# Altium PCB PCB1BK.PcbDoc
Units mil, origin at the board's own origin, x right, y up, seen from the top; angles counter-clockwise.
Board outline 6000 x 4000 mil, 2 copper layers (Top Layer, Bottom Layer); 109 components, 83 nets, 461 pads, 63 vias.
Unrouted connection lines stored in the file: 226.
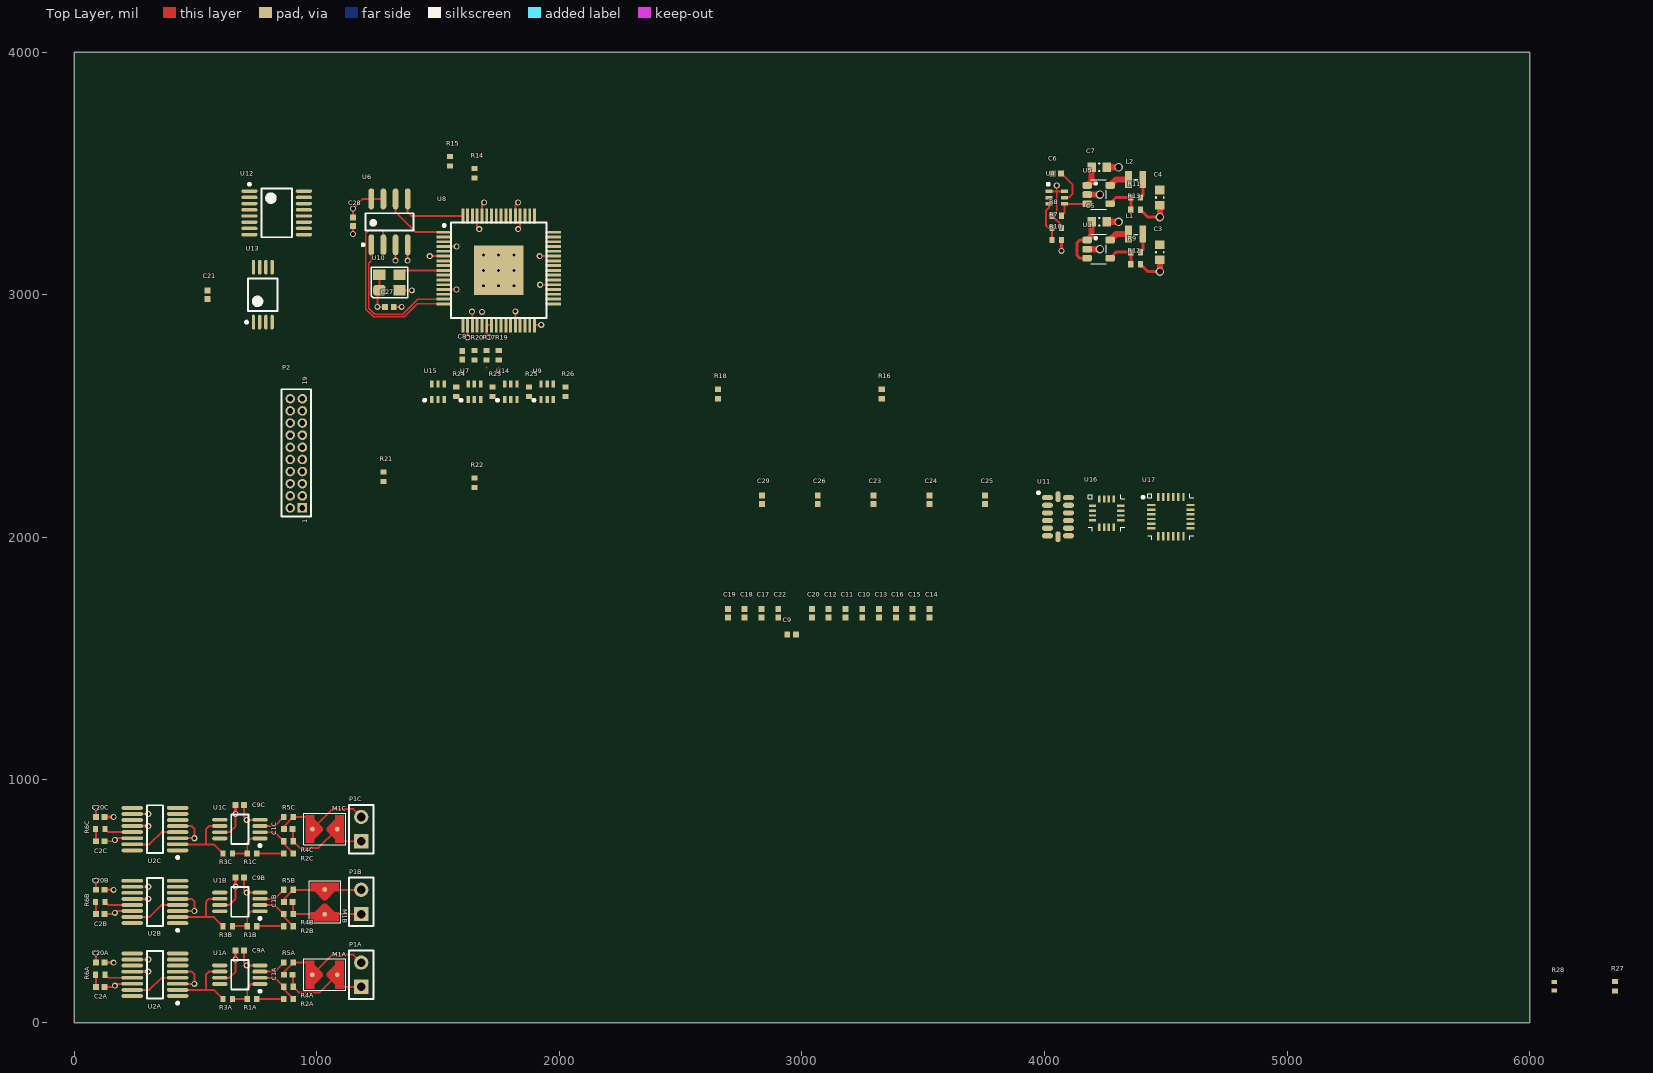
[diagram p0: Top Layer view]
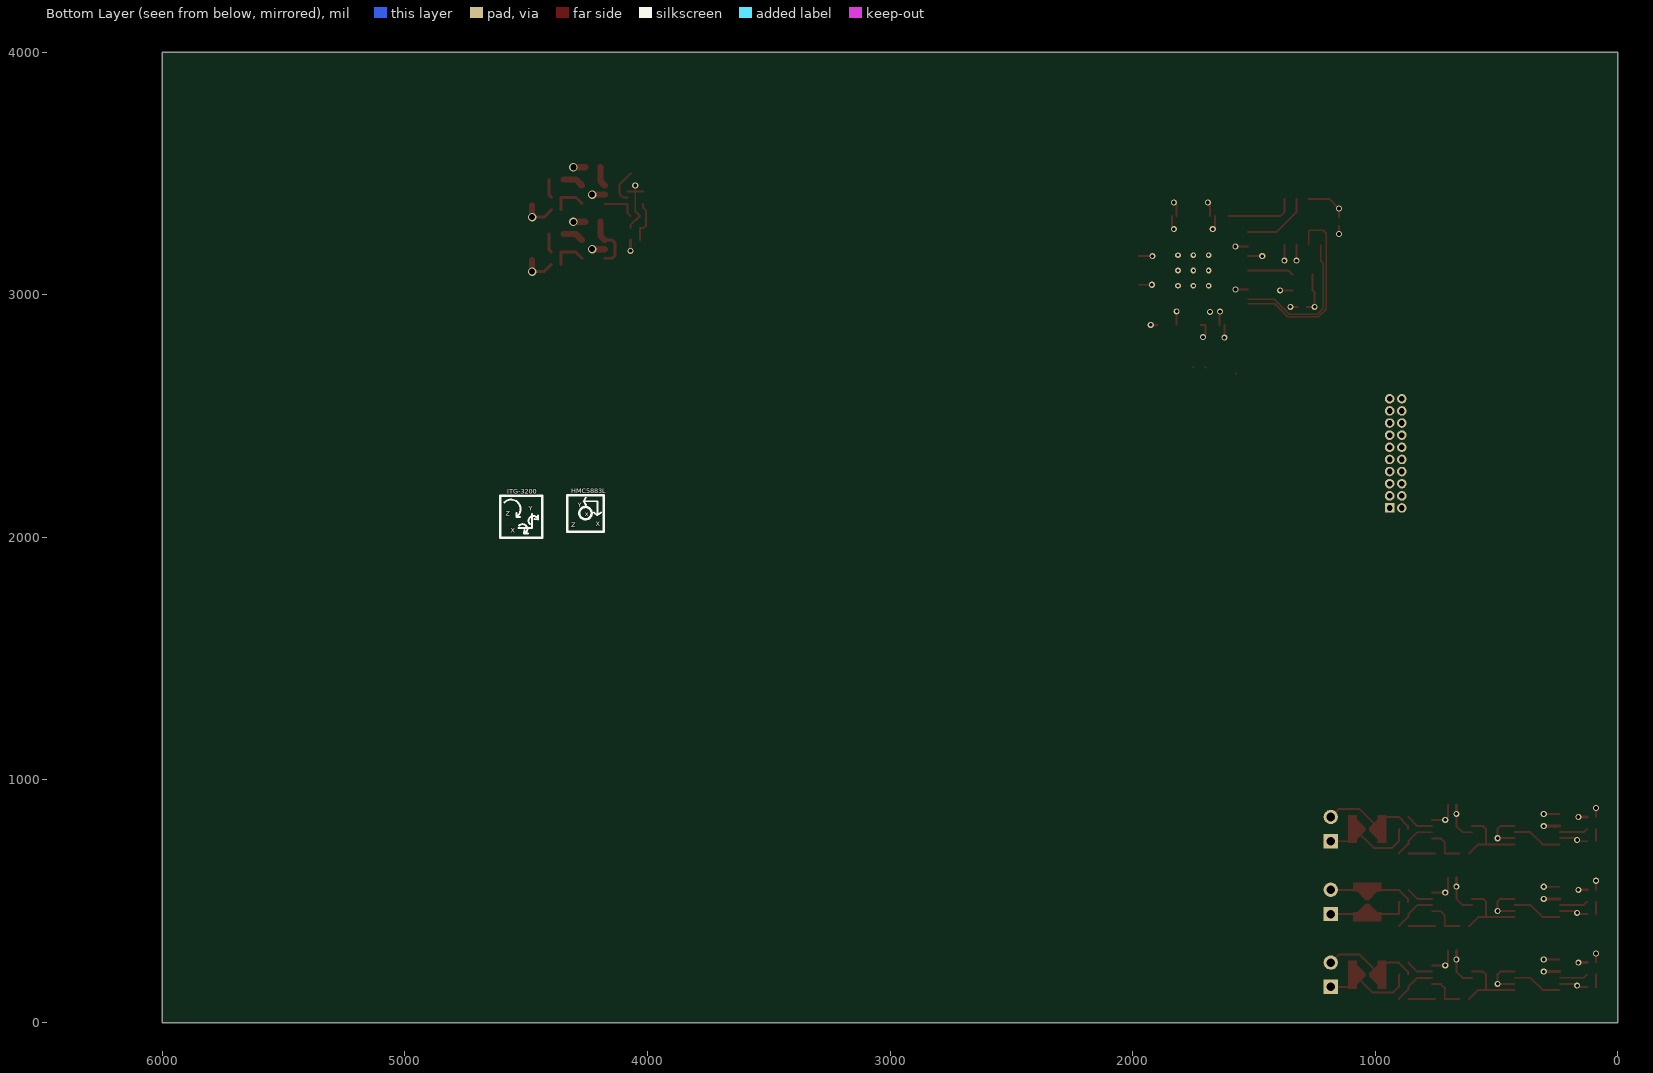
[diagram p1: Bottom Layer view, seen from below]

## Layer stack, top to bottom
Top Solder: solder mask 0.4, Solder Resist, Dk 3.5
Top Layer: signal copper 1.4
Dielectric 1: dielectric 12.6, FR-4, Dk 4.8
Bottom Layer: signal copper 1.4
Bottom Solder: solder mask 0.4, Solder Resist, Dk 3.5

## Board outline
0,0 6000,0 6000,4000 0,4000

## Design rules (kind name [scope] priority, off if disabled: settings)
Clearance [All] p1: gap=6
ComponentClearance [All] p1 off: gap=10 collisioncheckmode=3 verticalgap=10 showdistances=FALSE
HoleSize [All] p1: absolutevalues=TRUE maxlimit=100 minlimit=15 maxpercent=80.000 minpercent=20.000
HoleToHoleClearance [All] p1: gap=6 allowstackedmicrovias=TRUE
MinimumAnnularRing [All] p1: minimumring=5
PolygonConnect [All] p1: connectstyle=Relief reliefconductorwidth=10 reliefentries=4 polygonreliefangle="90 Angle" airgapwidth=10
RoomDefinition COIL2 [InComponentClass('COIL2')] p1: confinementstyle=ConfineIn formatcopy=TRUE lockcomponents=FALSE outline 33.5,647.5 1283.5,647.5 1283.5,947.5 33.5,947.5
RoomDefinition COIL1 [InComponentClass('COIL1')] p2: confinementstyle=ConfineIn formatcopy=TRUE lockcomponents=FALSE outline 33.5,347.5 1283.5,347.5 1283.5,647.5 33.5,647.5
RoomDefinition COIL0 [InComponentClass('COIL0')] p3: confinementstyle=ConfineIn formatcopy=TRUE lockcomponents=FALSE outline 33.5,47.5 1283.5,47.5 1283.5,347.5 33.5,347.5
RoutingVias [All] p1: holewidth=15 width=25 viastyle="Through Hole" minholewidth=15 minwidth=25 maxholewidth=40 maxwidth=50
SolderMaskExpansion [All] p1: expansion=4
UnpouredPolygon [All] p1: allowunpoured=FALSE
Width [All] p1: maxlimit=40 minlimit=6 preferedwidth=8
26 further rules are at their usual default settings.

## Classes and differential pairs
component class Top: R27 R28
component class COIL0: C1A C2A C9A C20A M1A P1A R1A R2A R3A R4A R5A R6A U1A U2A
component class COIL1: C1B C2B C9B C20B M1B P1B R1B R2B R3B R4B R5B R6B U1B U2B
component class COIL2: C1C C2C C9C C20C M1C P1C R1C R2C R3C R4C R5C R6C U1C U2C
component class CORE: C3 C4 C5 C6 C7 C8 C9 C10 C11 C12 C13 C14 C15 C16 C17 C18 C19 C20 C21 C22 L1 L2 P2 R7 R8 R9 R10 R11 R12 R13 R14 R15 R16 R17 R18 R19 R20 R21 R22 R23 R24 R25 R26 U3 U4 U5 U6 U7 U8 U9 U10 U12 U13 U14 U15
component class IMU: C23 C24 C25 C26 C27 C28 C29 U11 U16 U17
net class XLB: XLBR0 XLBR1 XLBT0 XLBT1
channel class Coils: COIL0 COIL1 COIL2

## Components (designator, comment, footprint, x,y, rotation, side; value= is the part's Value field where it differs from the comment)
C1A "CAP 25V 0402(1005)" CAPC0402(1005)60_N 883.5,197.5 r180 top (schematic designator C1)
C1B "CAP 25V 0402(1005)" CAPC0402(1005)60_N 883.5,497.5 r180 top (schematic designator C1)
C1C "CAP 25V 0402(1005)" CAPC0402(1005)60_N 883.5,797.5 r180 top (schematic designator C1)
C2A "CAP 100pF 25V 0402(1005)" CAPC0402(1005)60_N 108.5,147.5 r180 top (schematic designator C2)
C2B "CAP 100pF 25V 0402(1005)" CAPC0402(1005)60_N 108.5,447.5 r180 top (schematic designator C2)
C2C "CAP 100pF 25V 0402(1005)" CAPC0402(1005)60_N 108.5,747.5 r180 top (schematic designator C2)
C3 "CAP 10uF 6.3V 0603(1608)" CAPC0603(1608)100_N 4475,3175 r90 top
C4 "CAP 10uF 6.3V 0603(1608)" CAPC0603(1608)100_N 4475,3400 r90 top
C5 "CAP 10uF 6.3V 0603(1608)" CAPC0603(1608)100_N 4225,3300 r0 top
C6 "CAP 10nF 10V 0402(1005)" CAPC0402(1005)60_N 4050,3500 r0 top
C7 "CAP 10uF 6.3V 0603(1608)" CAPC0603(1608)100_N 4225,3525 r0 top
C8 "CAP 1uF 16V 0402(1005)" CAPC0402(1005)60_N 1600,2750 r270 top
C9 "CAP 100nF 25V 0402(1005)" CAPC0402(1005)60_N 2957.05,1600.1 r0 top
C9A "CAP 100nF 25V 0402(1005)" CAPC0402(1005)60_N 683.5,297.5 r180 top (schematic designator C9)
C9B "CAP 100nF 25V 0402(1005)" CAPC0402(1005)60_N 683.5,597.5 r180 top (schematic designator C9)
C9C "CAP 100nF 25V 0402(1005)" CAPC0402(1005)60_N 683.5,897.5 r180 top (schematic designator C9)
C10 "CAP 100nF 25V 0402(1005)" CAPC0402(1005)60_N 3248.31,1687.03 r90 top
C11 "CAP 100nF 25V 0402(1005)" CAPC0402(1005)60_N 3179.09,1687.03 r90 top
C12 "CAP 1uF 16V 0402(1005)" CAPC0402(1005)60_N 3109.88,1687.03 r90 top
C13 "CAP 1uF 16V 0402(1005)" CAPC0402(1005)60_N 3317.52,1687.03 r90 top
C14 "CAP 100nF 25V 0402(1005)" CAPC0402(1005)60_N 3525.16,1687.03 r90 top
C15 "CAP 100nF 25V 0402(1005)" CAPC0402(1005)60_N 3455.94,1687.03 r90 top
C16 "CAP 100nF 25V 0402(1005)" CAPC0402(1005)60_N 3386.73,1687.03 r90 top
C17 "CAP 100nF 25V 0402(1005)" CAPC0402(1005)60_N 2833.03,1687.03 r90 top
C18 "CAP 1uF 16V 0402(1005)" CAPC0402(1005)60_N 2763.82,1687.03 r90 top
C19 "CAP 1uF 16V 0402(1005)" CAPC0402(1005)60_N 2694.61,1687.03 r90 top
C20 "CAP 100nF 25V 0402(1005)" CAPC0402(1005)60_N 3040.67,1687.03 r90 top
C20A "CAP 100nF 25V 0402(1005)" CAPC0402(1005)60_N 108.5,247.5 r0 top (schematic designator C20)
C20B "CAP 100nF 25V 0402(1005)" CAPC0402(1005)60_N 108.5,547.5 r0 top (schematic designator C20)
C20C "CAP 100nF 25V 0402(1005)" CAPC0402(1005)60_N 108.5,847.5 r0 top (schematic designator C20)
C21 "CAP 100nF 25V 0402(1005)" CAPC0402(1005)60_N 550,3000 r90 top
C22 "CAP 1uF 16V 0402(1005)" CAPC0402(1005)60_N 2902.24,1687.03 r90 top
C23 "CAP 220nF 25V 0402(1005)" CAPC0402(1005)60_N 3295,2155 r90 top
C24 "CAP 100nF 25V 0402(1005)" CAPC0402(1005)60_N 3525,2155 r90 top
C25 "CAP 2.2nF 25V 0402(1005)" CAPC0402(1005)60_N 3755,2155 r90 top
C26 "CAP 4.7uF 6.3V 0402(1005)" CAPC0402(1005)60_N 3065,2155 r90 top
C27 "CAP 100nF 25V 0402(1005)" CAPC0402(1005)60_N 1300,2950 r180 top
C28 "CAP 100nF 25V 0402(1005)" CAPC0402(1005)60_N 1150,3300 r90 top
C29 "CAP 100nF 25V 0402(1005)" CAPC0402(1005)60_N 2835,2155 r90 top
L1 "2u2H" "2016 Inductor" 4375,3250 r0 top
L2 "2u2H" "2016 Inductor" 4375,3475 r0 top
M1A "Multi Footprint" MULTI 1033.5,197.5 r270 top (schematic designator M1)
M1B "Multi Footprint" MULTI 1033.5,497.5 r180 top (schematic designator M1)
M1C "Multi Footprint" MULTI 1033.5,797.5 r270 top (schematic designator M1)
P1A "IN" HDR1X2 1183.5,147.5 r90 top (schematic designator P1)
P1B "IN" HDR1X2 1183.5,447.5 r90 top (schematic designator P1)
P1C "IN" HDR1X2 1183.5,747.5 r90 top (schematic designator P1)
P2 "MHDR2X10" MHDR2X10 941,2121 r90 top
R1A "220R 1% 0402(1005)" RESC0402(1005)_N 733.5,97.5 r0 top (schematic designator R1)
R1B "220R 1% 0402(1005)" RESC0402(1005)_N 733.5,397.5 r0 top (schematic designator R1)
R1C "220R 1% 0402(1005)" RESC0402(1005)_N 733.5,697.5 r0 top (schematic designator R1)
R2A "10K 1% 0402(1005)" RESC0402(1005)_N 883.5,97.5 r0 top (schematic designator R2)
R2B "10K 1% 0402(1005)" RESC0402(1005)_N 883.5,397.5 r0 top (schematic designator R2)
R2C "10K 1% 0402(1005)" RESC0402(1005)_N 883.5,697.5 r0 top (schematic designator R2)
R3A "2K 1% 0402(1005)" RESC0402(1005)_N 633.5,97.5 r180 top (schematic designator R3)
R3B "2K 1% 0402(1005)" RESC0402(1005)_N 633.5,397.5 r180 top (schematic designator R3)
R3C "2K 1% 0402(1005)" RESC0402(1005)_N 633.5,697.5 r180 top (schematic designator R3)
R4A "10K 1% 0402(1005)" RESC0402(1005)_N 883.5,147.5 r180 top (schematic designator R4)
R4B "10K 1% 0402(1005)" RESC0402(1005)_N 883.5,447.5 r180 top (schematic designator R4)
R4C "10K 1% 0402(1005)" RESC0402(1005)_N 883.5,747.5 r180 top (schematic designator R4)
R5A "10K 1% 0402(1005)" RESC0402(1005)_N 883.5,247.5 r180 top (schematic designator R5)
R5B "10K 1% 0402(1005)" RESC0402(1005)_N 883.5,547.5 r180 top (schematic designator R5)
R5C "10K 1% 0402(1005)" RESC0402(1005)_N 883.5,847.5 r180 top (schematic designator R5)
R6A "10K 1% 0402(1005)" RESC0402(1005)_N 108.5,197.5 r0 top (schematic designator R6)
R6B "10K 1% 0402(1005)" RESC0402(1005)_N 108.5,497.5 r0 top (schematic designator R6)
R6C "10K 1% 0402(1005)" RESC0402(1005)_N 108.5,797.5 r0 top (schematic designator R6)
R7 "36K 1% 0402(1005)" RESC0402(1005)_N 4050,3275 r0 top
R8 "10K 1% 0402(1005)" RESC0402(1005)_N 4050,3325 r180 top
R9 "68K 1% 0402(1005)" RESC0402(1005)_N 4375,3175 r0 top
R10 "10K 1% 0402(1005)" RESC0402(1005)_N 4050,3225 r180 top
R11 "68K 1% 0402(1005)" RESC0402(1005)_N 4375,3400 r0 top
R12 "15K 5% 0402(1005)" RESC0402(1005)_N 4375,3125 r180 top
R13 "100K 1% 0402(1005)" RESC0402(1005)_N 4375,3350 r180 top
R14 "10K 1% 0402(1005)" RESC0402(1005)_N 1650,3500 r90 top
R15 "10K 1% 0402(1005)" RESC0402(1005)_N 1550,3550 r90 top
R16 "33R 5% 0402(1005)" RESC0402(1005)_N 3328.4,2590.96 r90 top
R17 "10K 1% 0402(1005)" RESC0402(1005)_N 1700,2750 r270 top
R18 "33R 5% 0402(1005)" RESC0402(1005)_N 2653.68,2590.96 r90 top
R19 "Jumper 0402(1005)" RESC0402(1005)_N 1750,2750 r90 top
R20 "4R7 5% 0402(1005)" RESC0402(1005)_N 1650,2750 r90 top
R21 "15K 1% 0402(1005)" RESC0402(1005)_N 1275,2250 r90 top
R22 "36K 1% 0402(1005)" RESC0402(1005)_N 1650,2225 r270 top
R23 "10K 1% 0402(1005)" RESC0402(1005)_N 1725,2600 r90 top
R24 "10K 1% 0402(1005)" RESC0402(1005)_N 1575,2600 r90 top
R25 "10K 1% 0402(1005)" RESC0402(1005)_N 1875,2600 r90 top
R26 "10K 1% 0402(1005)" RESC0402(1005)_N 2025,2600 r90 top
R27 "10K 1% 0402(1005)" RESC0402(1005)_N 6350,150 r90 top
R28 "5K6 5% 0402(1005)" RESC0402(1005)_L 6100,150 r90 top
U1A "INA332AIDGKT" TI-DGK8_N 683.5,197.5 r180 top (schematic designator U1)
U1B "INA332AIDGKT" TI-DGK8_N 683.5,497.5 r180 top (schematic designator U1)
U1C "INA332AIDGKT" TI-DGK8_N 683.5,797.5 r180 top (schematic designator U1)
U2A "LTC6912CGN-1#PBF" LT-GN-16_N 333.5,197.5 r180 top (schematic designator U2)
U2B "LTC6912CGN-1#PBF" LT-GN-16_N 333.5,497.5 r180 top (schematic designator U2)
U2C "LTC6912CGN-1#PBF" LT-GN-16_N 333.5,797.5 r180 top (schematic designator U2)
U3 "NCP1521B" TSOP5 4175,3225 r0 top
U4 "ADM1085AKSZ-REEL" KS_6 4050,3400 r0 top
U5 "NCP1521B" TSOP5 4175,3450 r0 top
U6 "W25X10" SO8_N 1300,3300 r90 top
U7 "NC7WZ17" KS_6 1650,2600 r90 top
U8 "XS1-L8A-64-LQ64-C4" XMOS-LQFP-64_V 1750,3100 r0 top
U9 "NC7WZ17" KS_6 1950,2600 r90 top
U10 "ASE-20.000MHZ-LC-T" "4-SMD (3.2 x 2.5mm)" 1300,3050 r0 top
U11 "ADXL345BCCZ" ADI-CC-14-1_V 4055,2085 r0 top
U12 "AD7924BRUZ" RU-16_N 835,3337 r0 top
U13 "ADR291GRUZ" ADI-RU-8_N 778,3000 r90 top
U14 "ADM1085AKSZ-REEL" KS_6 1800,2600 r90 top
U15 "ADM1085AKSZ-REEL" KS_6 1500,2600 r90 top
U16 "HMC5883L" HMC5883L 4255,2100 r0 top
U17 "ITG-3200" ITG-3200 4520,2085 r0 top

## Footprints (in the part's own frame and the unit in brackets; to place one, negate y for a bottom-side part, rotate by r counter-clockwise, add the part's x,y. Pads: shape width x height; smd on the part's side, far side on the other; paste and mask are expansions set on the pad)
"4-SMD (3.2 x 2.5mm)" [mm] "ASE Oscillator"
  rrect50% 1.3x1.1 smd: 1(-1.05,-0.825)
  rect 1.3x1.1 smd: 2(1.05,-0.825) 3(1.05,0.825) 4(-1.05,0.825)
  silkscreen extent -1.9,-1.6 1.9,1.6, body extent -1.6,-1.3 1.6,1.3, height 1.2
"2016 Inductor" [mm]
  rect 0.7x1.8 smd: 1(-0.75,0) 2(0.75,0)
  silkscreen extent -0.2,-0.1 0.2,0, body extent -0.9,-0.8 0.9,0.8, height 1.5
ADI-CC-14-1_V [mm] "QFN, 14-Leads, Body 5x3mm, Pitch 0.8mm"
  oval 1.145x0.55 smd: 1(-1.098,2) 2(-1.098,1.2) 3(-1.098,0.4) 4(-1.098,-0.4) 5(-1.098,-1.2) 6(-1.098,-2) 8(1.097,-2) 9(1.097,-1.2) 10(1.097,-0.4) 11(1.097,0.4) 12(1.097,1.2) 13(1.097,2)
  oval 0.55x1.145 smd: 7(0,-2.097) 14(0,2.098)
  silkscreen extent -2.18,2.38 -1.93,2.62, body extent -1.5,-2.5 1.5,2.5, height 1
ADI-RU-8_N [mm] "SOP, 8-Leads, Body 4.4x3mm, Pitch 0.65mm, IPC Medium Density"
  oval 1.55x0.35 smd: 1(-2.875,0.975) 2(-2.875,0.325) 3(-2.875,-0.325) 4(-2.875,-0.975) 5(2.875,-0.975) 6(2.875,-0.325) 7(2.875,0.325) 8(2.875,0.975)
  silkscreen extent -3,-1.55 1.7,1.82, body extent -2.25,-1.55 2.25,1.55, height 1.2
CAPC0402(1005)60_N [mm] "Chip Capacitor, Body 1.0x0.5mm, Height 0.6mm, IPC Medium Density"
  rect 0.62x0.62 smd: 1(-0.45,0) 2(0.45,0)
  body extent -0.55,-0.3 0.55,0.3, height 0.6
CAPC0603(1608)100_N [mm] "Chip Capacitor, Body 1.6x0.8mm, Height 1.0mm, IPC Medium Density"
  rect 0.9x1 smd: 1(-0.8,0) 2(0.8,0)
  silkscreen extent -0.05,-0.4 0.05,0.4, body extent -0.87,-0.48 0.88,0.47, height 1
HDR1X2 [mm] "Connector; Header; 2 Position"
  rect 1.5x1.5 hole 0.9: 1(0,0)
  round 1.5 hole 0.9: 2(2.54,0)
  silkscreen extent -1.27,-1.27 3.81,1.27
HMC5883L [mm]
  rect 0.762x0.25 smd mask+0.025: 1(-1.478,0.75) 2(-1.478,0.25) 3(-1.478,-0.25) 4(-1.478,-0.75) 9(1.478,-0.75) 10(1.478,-0.25) 11(1.478,0.25) 12(1.478,0.75)
  rect 0.25x0.762 smd mask+0.025: 5(-0.75,-1.478) 6(-0.25,-1.478) 7(0.25,-1.478) 8(0.75,-1.478) 13(0.75,1.478) 14(0.25,1.478) 15(-0.25,1.478) 16(-0.75,1.478)
  silkscreen extent -1.9,-1.9 1.9,1.9, body extent -1.5,-1.5 1.5,1.5, height 1.1
ITG-3200 [mm]
  rect 0.85x0.25 smd mask+0.025: 1(-2.05,1.229) 2(-2.05,0.739) 3(-2.05,0.249) 4(-2.05,-0.241) 5(-2.05,-0.731) 6(-2.05,-1.221) 13(2.05,-1.221) 14(2.05,-0.731) 15(2.05,-0.241) 16(2.05,0.249) 17(2.05,0.739) 18(2.05,1.229)
  rect 0.25x0.85 smd mask+0.025: 7(-1.325,-2.046) 8(-0.795,-2.046) 9(-0.265,-2.046) 10(0.265,-2.046) 11(0.795,-2.046) 12(1.325,-2.046) 19(1.324,2.054) 20(0.794,2.054) 21(0.264,2.054) 22(-0.265,2.054) 23(-0.795,2.054) 24(-1.325,2.054)
  silkscreen extent -3.02,-2.4 2.4,2.4, body extent -2,-2 2,2, height 1.05
KS_6 [mm]
  rect 0.75x0.356 smd: 1(-0.819,0.65) 2(-0.819,0) 3(-0.819,-0.65) 4(0.819,-0.65) 5(0.819,0) 6(0.819,0.65)
  silkscreen extent -1.02,1.27 -0.76,1.52, body extent -0.89,-1.02 0.89,1.02, height 1
LT-GN-16_N [mm] "SOP, 16-Leads, Body 4.9x3.9mm, Pitch 0.635mm, IPC Medium Density"
  oval 2.25x0.4 smd: 1(-2.375,2.222) 2(-2.375,1.587) 3(-2.375,0.952) 4(-2.375,0.317) 5(-2.375,-0.318) 6(-2.375,-0.953) 7(-2.375,-1.588) 8(-2.375,-2.223) 9(2.375,-2.222) 10(2.375,-1.587) 11(2.375,-0.952) 12(2.375,-0.317) 13(2.375,0.318) 14(2.375,0.953) 15(2.375,1.588) 16(2.375,2.223)
  silkscreen extent -2.5,-2.5 0.85,3.1, body extent -2,-2.5 2,2.5, height 1.75
MHDR2X10 [mm] "Connector; Header; 10x2 Position"
  rect 1x1 hole 0.6: 1(0,0)
  round 1 hole 0.6: 2(0,1.27) 3(1.27,0) 4(1.27,1.27) 5(2.54,0) 6(2.54,1.27) 7(3.81,0) 8(3.81,1.27) 9(5.08,0) 10(5.08,1.27) 11(6.35,0) 12(6.35,1.27) 13(7.62,0) 14(7.62,1.27) 15(8.89,0) 16(8.89,1.27) 17(10.16,0) 18(10.16,1.27) 19(11.43,0) 20(11.43,1.27)
  silkscreen extent -0.9,-0.9 12.43,2.17
MULTI [mm]
  round 0.5 smd paste-0.25: 1(0,1.3) 2(0,-1.3)
  Top Layer region: 0.15,0.2 1.05,1.1 1.45,1.1 1.45,2 -1.45,2 -1.45,1.1 -1.05,1.1 -0.15,0.2
  Top Layer region: -0.15,-0.2 -1.05,-1.1 -1.45,-1.1 -1.45,-2 1.45,-2 1.45,-1.1 1.05,-1.1 0.15,-0.2
  silkscreen extent -1.65,-2.2 1.65,2.2
RESC0402(1005)_L [mm] "Chip Resistor, Body 1.0x0.5mm, IPC High Density"
  rect 0.45x0.55 smd: 1(-0.45,0) 2(0.45,0)
  body extent -0.52,-0.27 0.53,0.28, height 0.4
RESC0402(1005)_N [mm] "Chip Resistor, Body 1.0x0.5mm, IPC Medium Density"
  rect 0.55x0.65 smd: 1(-0.5,0) 2(0.5,0)
  body extent -0.52,-0.27 0.53,0.28, height 0.4
RU-16_N [mm] "TSOP, 16-Leads, Body 5x4.4mm, Pitch 0.65mm, IPC Medium Density"
  oval 1.7x0.35 smd: 1(-2.85,2.275) 2(-2.85,1.625) 3(-2.85,0.975) 4(-2.85,0.325) 5(-2.85,-0.325) 6(-2.85,-0.975) 7(-2.85,-1.625) 8(-2.85,-2.275) 9(2.85,-2.275) 10(2.85,-1.625) 11(2.85,-0.975) 12(2.85,-0.325) 13(2.85,0.325) 14(2.85,0.975) 15(2.85,1.625) 16(2.85,2.275)
  silkscreen extent -2.97,-2.55 1.6,3.12, body extent -2.25,-2.55 2.25,2.55, height 1.2
SO8_N [mm] "SOIC, 8-Leads, Body 4.9x3.9mm, Pitch 1.27mm, IPC Medium Density"
  oval 2.2x0.6 smd: 1(-2.4,1.905) 2(-2.4,0.635) 3(-2.4,-0.635) 4(-2.4,-1.905) 5(2.4,-1.905) 6(2.4,-0.635) 7(2.4,0.635) 8(2.4,1.905)
  silkscreen extent -2.52,-2.5 0.9,2.88, body extent -2,-2.5 2,2.5, height 1.75
TI-DGK8_N [mm] "SOP, 8-Leads, Body 3.1x3.1mm, Pitch 0.65mm, IPC Medium Density"
  oval 1.6x0.4 smd: 1(-2.1,0.975) 2(-2.1,0.325) 3(-2.1,-0.325) 4(-2.1,-0.975) 5(2.1,-0.975) 6(2.1,-0.325) 7(2.1,0.325) 8(2.1,0.975)
  silkscreen extent -2.23,-1.55 0.9,1.85, body extent -1.55,-1.55 1.55,1.55, height 1.1
TSOP5 [mm]
  rrect50% 1x0.7 smd: 1(0,0) 2(0,-0.95) 3(0,-1.9) 4(2.4,-1.9) 5(2.4,0)
  silkscreen extent 0.4,-2.5 2,0.6, body extent 0.35,-2.55 2.05,0.65, height 1
XMOS-LQFP-64_V [mm] "LQFP, 64-Leads, Body 10x10mm, Pitch 0.5mm, Thermal Pad 5.2x5.2mm"
  rect 1.6x0.3 smd: 1(-5.7,4) 2(-5.7,3.5) 3(-5.7,3) 4(-5.7,2.5) 5(-5.7,2) 6(-5.7,1.5) 7(-5.7,1) 8(-5.7,0.5) 9(-5.7,0) 10(-5.7,-0.5) 11(-5.7,-1) 12(-5.7,-1.5) 13(-5.7,-2) 14(-5.7,-2.5) 15(-5.7,-3) 16(-5.7,-3.5) 33(5.7,-3.5) 34(5.7,-3) 35(5.7,-2.5) 36(5.7,-2) 37(5.7,-1.5) 38(5.7,-1) 39(5.7,-0.5) 40(5.7,0) 41(5.7,0.5) 42(5.7,1) 43(5.7,1.5) 44(5.7,2) 45(5.7,2.5) 46(5.7,3) 47(5.7,3.5) 48(5.7,4)
  rect 0.3x1.6 smd: 17(-3.75,-5.7) 18(-3.25,-5.7) 19(-2.75,-5.7) 20(-2.25,-5.7) 21(-1.75,-5.7) 22(-1.25,-5.7) 23(-0.75,-5.7) 24(-0.25,-5.7) 25(0.25,-5.7) 26(0.75,-5.7) 27(1.25,-5.7) 28(1.75,-5.7) 29(2.25,-5.7) 30(2.75,-5.7) 31(3.25,-5.7) 32(3.75,-5.7) 49(3.75,5.7) 50(3.25,5.7) 51(2.75,5.7) 52(2.25,5.7) 53(1.75,5.7) 54(1.25,5.7) 55(0.75,5.7) 56(0.25,5.7) 57(-0.25,5.7) 58(-0.75,5.7) 59(-1.25,5.7) 60(-1.75,5.7) 61(-2.25,5.7) 62(-2.75,5.7) 63(-3.25,5.7) 64(-3.75,5.7)
  rect 5.2x5.2 smd paste-2.6: 65(0,0)
  silkscreen extent -5.82,-5 5,5, body extent -5,-5 5,5, height 1.6

## Part data
C1A C1B C1C: library part CMP-1034-00714-1, "CAP 25V ±1% 0402 (1005 Metric) Thickness 0.6mm SMD"
C2A C2B C2C: library part CMP-1034-01239-1, "CAP 100pF 25V ±1% 0402 (1005 Metric) Thickness 0.6mm SMD"
C3 C4 C5 C7: library part CMP-1035-02797-1, "CAP 10uF 6.3V ±20% 0603 (1608 Metric) Thickness 1mm SMD"
C6: library part CMP-1034-01870-1, "CAP 10nF 10V ±5% 0402 (1005 Metric) Thickness 0.6mm SMD"
C8 C12 C13 C18 C19 C22: library part CMP-1034-02120-1, "CAP 1uF 16V ±20% 0402 (1005 Metric) Thickness 0.6mm SMD"
C9 C9A C9B C9C C10 C11 C14 C15 C16 C17 C20 C20A C20B C20C C21 C24 C27 C28 C29: library part CMP-1034-02073-1, "CAP 100nF 25V ±20% 0402 (1005 Metric) Thickness 0.6mm SMD"
C23: library part CMP-1034-02093-1, "CAP 220nF 25V ±20% 0402 (1005 Metric) Thickness 0.6mm SMD"
C25: library part CMP-1034-01740-1, "CAP 2.2nF 25V ±20% 0402 (1005 Metric) Thickness 0.6mm SMD"
C26: library part CMP-1034-02137-1, "CAP 4.7uF 6.3V ±20% 0402 (1005 Metric) Thickness 0.6mm SMD"
L1 L2: library part "2016 Inductor"
M1A M1B M1C: library part Multi
P1A P1B P1C: library part "Header 2", "Header, 2-Pin"
P2: "Header, 10-Pin, Dual row"
R1A R1B R1C: library part CMP-1011-00433-1, "220R 0.063W 1% 0402 (1005 Metric)  SMD"
R2A R2B R2C R4A R4B R4C R5A R5B R5C R6A R6B R6C R8 R10 R14 R15 R17 R23 R24 R25 R26 R27: library part CMP-1011-00623-1, "10K 0.063W 1% 0402 (1005 Metric)  SMD"
R3A R3B R3C: library part CMP-1011-00542-1, "2K 0.063W 1% 0402 (1005 Metric)  SMD"
R7 R22: library part CMP-1011-00685-1, "36K 0.063W 1% 0402 (1005 Metric)  SMD"
R9 R11: library part CMP-1011-00717-1, "68K 0.063W 1% 0402 (1005 Metric)  SMD"
R12: library part CMP-1011-00102-1, "15K 0.063W 5% 0402 (1005 Metric)  SMD"
R13: library part CMP-1011-00736-1, "100K 0.063W 1% 0402 (1005 Metric)  SMD"
R16 R18: library part CMP-1011-00038-1, "33R 0.063W 5% 0402 (1005 Metric)  SMD"
R19: library part CMP-1011-00001-1, "Jumper 0402 (1005 Metric)"
R20: library part CMP-1011-00018-1, "4R7 0.063W 5% 0402 (1005 Metric)  SMD"
R21: library part CMP-1011-00641-1, "15K 0.063W 1% 0402 (1005 Metric)  SMD"
R28: library part CMP-1011-00092-1, "5K6 0.063W 5% 0402 (1005 Metric)  SMD"
U1A U1B U1C: library part CMP-0944-00079-1, "Low-Power, Single Supply, CMOS, Low Cost, Instrumentation Amplifier, -55 to 125 degC, 8-pin SOP (DGK8), Green (RoHS & no Sb/Br)"
U2A U2B U2C: library part CMP-0359-00187-2, "Dual Channel, Dual Programmable Gain Amplifier with Serial Digital Interface, 30 MHz Typical GBW, 16 V/us Typical SR, 2.7 to 10.5 V, 16-Pin SOP (GN-16), Commercial, Pb-Free"
U4 U14 U15: "Imported"
U8: library part CMP-0854-00004-1, "8 Core XS1-L 32-bit Multicore Microcontroller, 36 I/O, 0 to 70 degC, 64-Pin LQFP, Pb-Free, Tray"
U11: library part CMP-0885-00027-1, "3-Axis, +/-2 g / +/-4 g / +/-8 g / +/-16 g Digital Accelerometer with Digital Output, 1.6 KHz BW, Industrial, 14-pin LGA, Tray"
U12: library part CMP-0313-02203-2, "Quad 12-Bit Analog-to-Digital Converter with Serial, SPI Interface and Sequencer, 1MSPS, 0 to +70 degC, RU-16, Pb-Free, Tube"
U13: library part CMP-0784-00483-1, "Low Noise Micropower Precision Voltage Reference, 2.5 V Output, 2.8 to 15 V Supply, Industrial, 8-pin SOP (RU-8), Tube"

## Via types
v1: diameter 25, hole 15, Top Layer to Bottom Layer, tented both sides, 46 vias
v2: diameter 23.62, hole 11.81, Top Layer to Bottom Layer, 9 vias
v3: diameter 35, hole 25, Top Layer to Bottom Layer, 6 vias
v4: diameter 25, hole 15, Top Layer to Bottom Layer, 2 vias

## Nets (pads, with @x,y where several pads share a name; then routed paths per layer and width w, separated by ;. In a path a pad name is that pad's centre, name@x,y a point inside that pad or via, vN(x,y) a via of type N, cw(c..) or ccw(c..) an arc to the next point about the centre after c; other vN are vias at no path point)
3V3: C3.2 C12.2 C13.2 C14.2 C15.2 C22.2 C27.2 C28.2 C29.2 L1.2 R7.2 R8.2 R9.2 R14.2 R15.2 R17.2 R23.2 R24.2 R25.2 R26.2 U4.1 U4.6 U6.3 U6.7 U6.8 U7.5 U8.6 U8.18 U8.22 U8.23 U8.32 U8.40 U8.53 U8.60 U9.5 U10.1 U10.4 U11.1 U11.6 U11.7 U11.12 U12.15 U13.2 U14.1 U14.6 U15.1 U15.6 U16.2 U16.4 U16.13 U17.8 U17.13 | length 1089.3
  Top Layer w8: C28.2 v1(1150,3355) 1189.49,3394.49 U6.8 U6.7 ; U10.4 U10.1 1250,3008.86 v1(1250,2950) C27.2 ; v1(1325,3140) U6.3 ; v1(1465.94,3159.06) U8.6 ; v1(1622.05,2822.95) U8.18 ; U8.60 1681.1,3371.1 v1(1690,3380) ; v1(1710,2825) 1700.79,2834.21 U8.22 U8.23 ; U8.53 1818.9,3368.9 v1(1830,3380) ; U8.32 v1(1925.59,2875.59) ; U4.1 4050,3425.59 ; v4(4050,3450) 4050,3425.59 ; R7.2 4069.69,3285.63 R8.2 4050,3344.69 4050,3425.59 ; U4.6 4050,3425.59
  Top Layer w12: R9.2 4404.53,3184.84 L1.2
5V: C5.1 C7.1 C9.2 C9A.2 C9B.2 C9C.2 C10.2 C11.2 C20.2 C20A.2 C20B.2 C20C.2 P2.12 P2.14 P2.16 P2.18 P2.20 U1A.7 U1B.7 U1C.7 U2A.12 U2B.12 U2C.12 U3.1 U3.3 U5.1 U12.5 U12.6 | length 1108.4
  Top Layer w8: U1A.7 640.71,184.7 665.79,209.78 v1(665.79,260.22) ; U1B.7 640.71,484.7 665.79,509.78 v1(665.79,560.22) ; U1C.7 640.71,784.7 665.79,809.78 v1(665.79,860.22)
  Top Layer w12: C20A.2 v1(163.5,247.5) ; C20B.2 v1(163.5,547.5) ; C20C.2 v1(163.5,847.5) ; U2A.12 v1(306,210) ; U2B.12 v1(306,510) ; U2C.12 v1(306,810) ; v1(665.79,260.22) C9A.2 ; v1(665.79,560.22) C9B.2 ; v1(665.79,860.22) C9C.2 ; U3.3 4144.8,3150.2 4134,3161 4134,3214 4145,3225 U3.1
  Top Layer w26: U3.1 4193.5,3243.5 C5.1 ; U5.1 4193.5,3468.5 C7.1
/RST: P2.15 R24.1 U7.1 U15.4
/RSTB: U7.6 U8.8
/TRST: P2.13 R23.1 U7.3 U14.4
/TRSTB: U7.4 U8.26
ADC_CLK: U8.34 U12.1
ADC_CS: U8.41 U12.3
ADC_MISO: U8.42 U12.14
ADC_MOSI: U8.33 U12.2
DEBUG: U8.17
FLASH_CLK: U6.6 U8.1 | length 289.3
  Top Layer w8: U6.6 1325,3340 1407.52,3257.48 U8.1
FLASH_CS: U6.1 U8.15 | length 611.2
  Top Layer w6: U6.1 1225,3140 1215,3130 1215,2945 1240,2920 1355,2920 1416.89,2981.89 U8.15
FLASH_DI: U6.5 U8.64 | length 288.3
  Top Layer w8: U6.5 1375,3340 1390.59,3324.41 U8.64
FLASH_DO: U6.2 U8.16 | length 804.8
  Top Layer w6: U6.2 1275,3260 1270,3265 1215,3265 1203,3253 1203,2940.03 1235.03,2908 1359.97,2908 1414.18,2962.2 U8.16
GND: C2A.1 C2B.1 C2C.1 C3.1 C4.1 C5.2 C6.1 C7.2 C8.2 C9.1 C9A.1 C9B.1 C9C.1 C10.1 C11.1 C12.1 C13.1 C14.1 C15.1 C16.1 C17.1 C18.1 C19.1 C20.1 C20A.1 C20B.1 C20C.1 C21.1 C22.1 C24.1 C25.1 C26.1 C27.1 C28.1 C29.1 P2.2 P2.4 P2.6 P2.8 P2.10 R10.1 R12.1 R13.1 R19.1 R22.1 R27.1 U1A.4 U1B.4 U1C.4 U2A.3 U2A.5 U2A.10 U2A.14 U2B.3 U2B.5 U2B.10 U2B.14 U2C.3 U2C.5 U2C.10 U2C.14 U3.2 U4.2 U5.2 U6.4 U7.2 U8.19 U8.65 U9.2 U10.2 U11.2 U11.4 U11.5 U12.4 U12.8 U12.13 U12.16 U13.4 U14.2 U15.2 U16.9 U16.11 U17.1 U17.9 U17.11 U17.18 | length 2339.8
  Top Layer w8: C20A.1 v1(90.79,284.78) ; C20B.1 v1(90.79,584.78) ; C20C.1 v1(90.79,884.78) ; C2A.1 163.5,147.5 v1(168.5,152.5) 176,160 U2A.14 ; C2B.1 163.5,447.5 v1(168.5,452.5) 176,460 U2B.14 ; C2C.1 163.5,747.5 v1(168.5,752.5) 176,760 U2C.14 ; U2A.10 v1(306,260) ; U2B.10 v1(306,560) ; U2C.10 v1(306,860) ; U2A.3 v1(496,160) 496,200 486,210 U2A.5 ; U2B.3 v1(496,460) 496,500 486,510 U2B.5 ; U2C.3 v1(496,760) 496,800 486,810 U2C.5 ; C9A.1 701.22,246.56 v1(711.89,235.89) U1A.4 ; C9B.1 701.22,546.56 v1(711.89,535.89) U1B.4 ; C9C.1 701.22,846.56 v1(711.89,835.89) U1C.4 ; v1(1150,3250) C28.1 ; C27.1 v1(1350,2950) ; U10.2 v1(1392.48,3017.52) ; v1(1375,3140) U6.4 ; v1(1640,2930) 1641.73,2928.27 U8.19
  Top Layer w12: v4(4069.69,3180.31) R10.1 ; R12.1 4424.68,3095 v3(4475,3095) ; R13.1 4424.68,3320 v3(4475,3320)
  Top Layer w24: v3(4475,3095) C3.1 ; v3(4475,3320) C4.1
  Top Layer w26: U3.2 v3(4227.6,3187.6) ; U5.2 v3(4227.6,3412.6) ; C5.2 v3(4305,3300) ; C7.2 v3(4305,3525)
  other v2: 1687.01,3037.01 1750,3037.01 1812.99,3037.01 1687.01,3100 1750,3100 1812.99,3100 1687.01,3162.99 1750,3162.99 1812.99,3162.99
MODE3: R17.1 R19.2 U8.24 U8.25
NetC1A_1: C1A.1 M1A.1 P1A.1 R4A.1 | length 352.7
  Top Layer w8: C1A.1 903.19,195.53 R4A.1 925.69,125 1012.19,125 M1A.1 ; 1102.5,147.5 P1A.1
NetC1A_2: C1A.2 M1A.2 P1A.2 R5A.1 | length 373.6
  Top Layer w8: C1A.2 865.79,210.1 R5A.1 962.5,247.5 ; M1A.2 1064.82,280 1151,280 P1A.2
NetC1B_1: C1B.1 M1B.1 P1B.1 R4B.1 | length 332.1
  Top Layer w8: C1B.1 903.19,495.53 R4B.1 1032.32,447.5 M1B.1 1034.69,447.5 P1B.1
NetC1B_2: C1B.2 M1B.2 P1B.2 R5B.1 | length 346.8
  Top Layer w8: C1B.2 865.79,510.1 R5B.1 1032.32,547.5 M1B.2 1034.69,547.5 P1B.2
NetC1C_1: C1C.1 M1C.1 P1C.1 R4C.1 | length 356.8
  Top Layer w8: C1C.1 903.19,795.53 R4C.1 930.69,720 1007.19,720 M1C.1 ; 1102.5,747.5 P1C.1
NetC1C_2: C1C.2 M1C.2 P1C.2 R5C.1 | length 368.6
  Top Layer w8: C1C.2 865.79,810.1 R5C.1 957.5,847.5 ; M1C.2 1064.82,880 1151,880 P1C.2
NetC6_2: C6.2 U4.5 | length 143.5
  Top Layer w8: C6.2 4115,3452.72 4115,3415 4100,3400 U4.5
NetC8_1: C8.1 R20.2 U8.20
NetC23_1: C23.1 U16.12
NetC23_2: C23.2 U16.8
NetC24_2: C24.2 U17.10
NetC25_2: C25.2 U17.20
NetC26_2: C26.2 U16.10
NetL1_1: L1.1 U3.5 | length 86.3
  Top Layer w26: U3.5 4294.49,3250 L1.1
NetL2_1: L2.1 U5.5 | length 86.3
  Top Layer w26: U5.5 4294.49,3475 L2.1
NetR1A_1: R1A.1 R3A.1 U1A.1 | length 165.3
  Top Layer w8: R3A.1 R1A.1 713.82,142.18 713.5,142.5 730.12,159.11 U1A.1
NetR1B_1: R1B.1 R3B.1 U1B.1 | length 165.3
  Top Layer w8: R3B.1 R1B.1 713.82,442.18 713.5,442.5 730.12,459.11 U1B.1
NetR1C_1: R1C.1 R3C.1 U1C.1 | length 165.3
  Top Layer w8: R3C.1 R1C.1 713.82,742.18 713.5,742.5 730.12,759.11 U1C.1
NetR2A_2: R2A.2 R4A.2 U1A.2 | length 179.4
  Top Layer w8: U1A.2 826.61,184.7 R4A.2 863.82,136.87 R2A.2
NetR2B_2: R2B.2 R4B.2 U1B.2 | length 179.4
  Top Layer w8: U1B.2 826.61,484.7 R4B.2 863.82,436.87 R2B.2
NetR2C_2: R2C.2 R4C.2 U1C.2 | length 179.4
  Top Layer w8: U1C.2 826.61,784.7 R4C.2 863.82,736.87 R2C.2
NetR3A_2: R3A.2 U1A.6 U2A.2 | length 327.5
  Top Layer w8: U2A.2 543.5,135 ; U1A.6 556.3,210.3 543.5,197.5 543.5,135 ; R3A.2 576.32,135 543.5,135
NetR3B_2: R3B.2 U1B.6 U2B.2 | length 327.5
  Top Layer w8: U2B.2 543.5,435 ; U1B.6 556.3,510.3 543.5,497.5 543.5,435 ; R3B.2 576.32,435 543.5,435
NetR3C_2: R3C.2 U1C.6 U2C.2 | length 327.5
  Top Layer w8: U2C.2 543.5,735 ; U1C.6 556.3,810.3 543.5,797.5 543.5,735 ; R3C.2 576.32,735 543.5,735
NetR5A_2: R5A.2 U1A.3 | length 113
  Top Layer w8: U1A.3 826.61,210.3 R5A.2
NetR5B_2: R5B.2 U1B.3 | length 113
  Top Layer w8: U1B.3 826.61,510.3 R5B.2
NetR5C_2: R5C.2 U1C.3 | length 113
  Top Layer w8: U1C.3 826.61,810.3 R5C.2
NetR6A_2: R6A.2 U2A.13 | length 117
  Top Layer w8: R6A.2 140.69,185 U2A.13
NetR6B_2: R6B.2 U2B.13 | length 117
  Top Layer w8: R6B.2 140.69,485 U2B.13
NetR6C_2: R6C.2 U2C.13 | length 117
  Top Layer w8: R6C.2 140.69,785 U2C.13
NetR7_1: R7.1 R10.2 U4.3 | length 174.1
  Top Layer w8: U4.3 4017.75,3357.75 4005,3345 4005,3285 4015,3275 R7.1 R10.2
NetR8_1: R8.1 U4.4 U5.3 | length 147.7
  Top Layer w8: R8.1 4082.25,3337.56 U4.4 4174.21,3374.41 U5.3
NetR9_1: R9.1 R12.2 U3.4 | length 146.1
  Top Layer w12: U3.4 4294.29,3175 R9.1 R12.2
NetR11_1: R11.1 R13.2 U5.4 | length 146.1
  Top Layer w12: U5.4 4294.29,3400 R11.1 R13.2
NetR16_1: R16.1 U8.57
NetR18_1: R18.1 U8.56
NetR21_1: R21.1 R22.2 U14.3 U15.3
NetR28_2: R28.2 U2A.9
NetU2A_4: U2A.4 U2A.15 | length 207.7
  Top Layer w8: U2A.15 311,135 361,185 U2A.4
NetU2A_7: U2A.7 U2B.9
NetU2B_4: U2B.4 U2B.15 | length 207.7
  Top Layer w8: U2B.15 311,435 361,485 U2B.4
NetU2B_7: U2B.7 U2C.9
NetU2C_4: U2C.4 U2C.15 | length 207.7
  Top Layer w8: U2C.15 311,735 361,785 U2C.4
NetU8_9: U8.9 U10.3 | length 191.5
  Top Layer w8: U10.3 1358.86,3100 U8.9
NetU12_9: U12.9
PGA_CLK: U2A.8 U2B.8 U2C.8 U8.49
PGA_CS: U2A.6 U2B.6 U2C.6 U8.46
PGA_MISO: R27.2 R28.1 U8.48
PGA_MOSI: U2C.7 U8.47
SCL: R14.1 U8.62 U11.14 U16.1 U17.23
SDA: R15.1 U8.63 U11.13 U16.16 U17.24
TCK: P2.17 R26.1 U9.3
TCKB: U8.29 U9.4
TDI: P2.11 U8.30
TDO: P2.9 U8.31
TMS: P2.19 R25.1 U9.1
TMSB: U8.27 U9.6
VDD: C4.2 C16.2 C17.2 C18.2 C19.2 L2.2 R11.2 R20.1 R21.2 U8.4 U8.13 U8.21 U8.28 U8.37 U8.43 U8.52 U8.61 | length 461
  Top Layer w8: U8.13 v1(1576.26,3021.26) ; U8.4 v1(1576.57,3198.43) ; U8.61 1661.42,3278.58 v1(1670,3270) ; U8.28 v1(1818.9,2931.1) ; v1(1830,3270) 1838.58,3278.58 U8.52 ; v1(1919.06,3159.06) U8.43 ; v1(1920.95,3040.95) U8.37
  Top Layer w12: R11.2 4404.53,3409.84 L2.2
  other v1: 1681.1,2928.9
VIN0: C2A.2 R6A.1 U12.12 | length 50.8
  Top Layer w8: R6A.1 90.79,195.53 C2A.2
VIN1: C2B.2 R6B.1 U12.11 | length 50.8
  Top Layer w8: R6B.1 90.79,495.53 C2B.2
VIN2: C2C.2 R6C.1 U12.10 | length 50.8
  Top Layer w8: R6C.1 90.79,795.53 C2C.2
VREF: C21.2 R1A.2 R1B.2 R1C.2 R2A.1 R2B.1 R2C.1 U1A.5 U1B.5 U1C.5 U12.7 U13.6 | length 331.9
  Top Layer w8: R1A.2 R2A.1 ; R1B.2 R2B.1 ; R1C.2 R2C.1
XLBR0: P2.5 U8.55
XLBR1: P2.7 U8.54
XLBT0: P2.3 R18.2
XLBT1: P2.1 R16.2
pads on no net: U1A.8 U1B.8 U1C.8 U2A.1 U2A.11 U2A.16 U2B.1 U2B.11 U2B.16 U2C.1 U2C.11 U2C.16 U8.2 U8.3 U8.5 U8.7 U8.10 U8.11 U8.12 U8.14 U8.35 U8.36 U8.38 U8.39 U8.44 U8.45 U8.50 U8.51 U8.58 U8.59 U11.3 U11.8 U11.9 U11.10 U11.11 U13.1 U13.3 U13.5 U13.7 U13.8 U14.5 U15.5 U16.3 U16.5 U16.6 U16.7 U16.14 U16.15 U17.2 U17.3 U17.4 U17.5 U17.6 U17.7 U17.12 U17.14 U17.15 U17.16 U17.17 U17.19 U17.21 U17.22

## Text inside footprints (layer, text, board x,y; h text height)
P2: Top Overlay "1" at 961,2058.01 h20 r90; Top Overlay "19" at 961,2628.87 h20 r90
U16: Bottom Overlay "Z" at 4314.06,2040.95 h20; Bottom Overlay "x" at 4242.09,2087 h20; Bottom Overlay "Y" at 4270.62,2124.61 h20; Bottom Overlay "X" at 4193.35,2045 h20
U17: Bottom Overlay "Z" at 4583.95,2088.67 h20; Bottom Overlay "X" at 4563.68,2018.63 h20; Bottom Overlay "Y" at 4487.82,2109.95 h20